# Altium PCB mdap2.PcbDoc
Units mil, origin at the board's own origin, x right, y up, seen from the top; angles counter-clockwise.
Board outline 6000 x 4000 mil, 3 copper layers (Top Layer, Mid-Layer 2, Bottom Layer); 94 components, 0 nets, 431 pads, 258 vias.
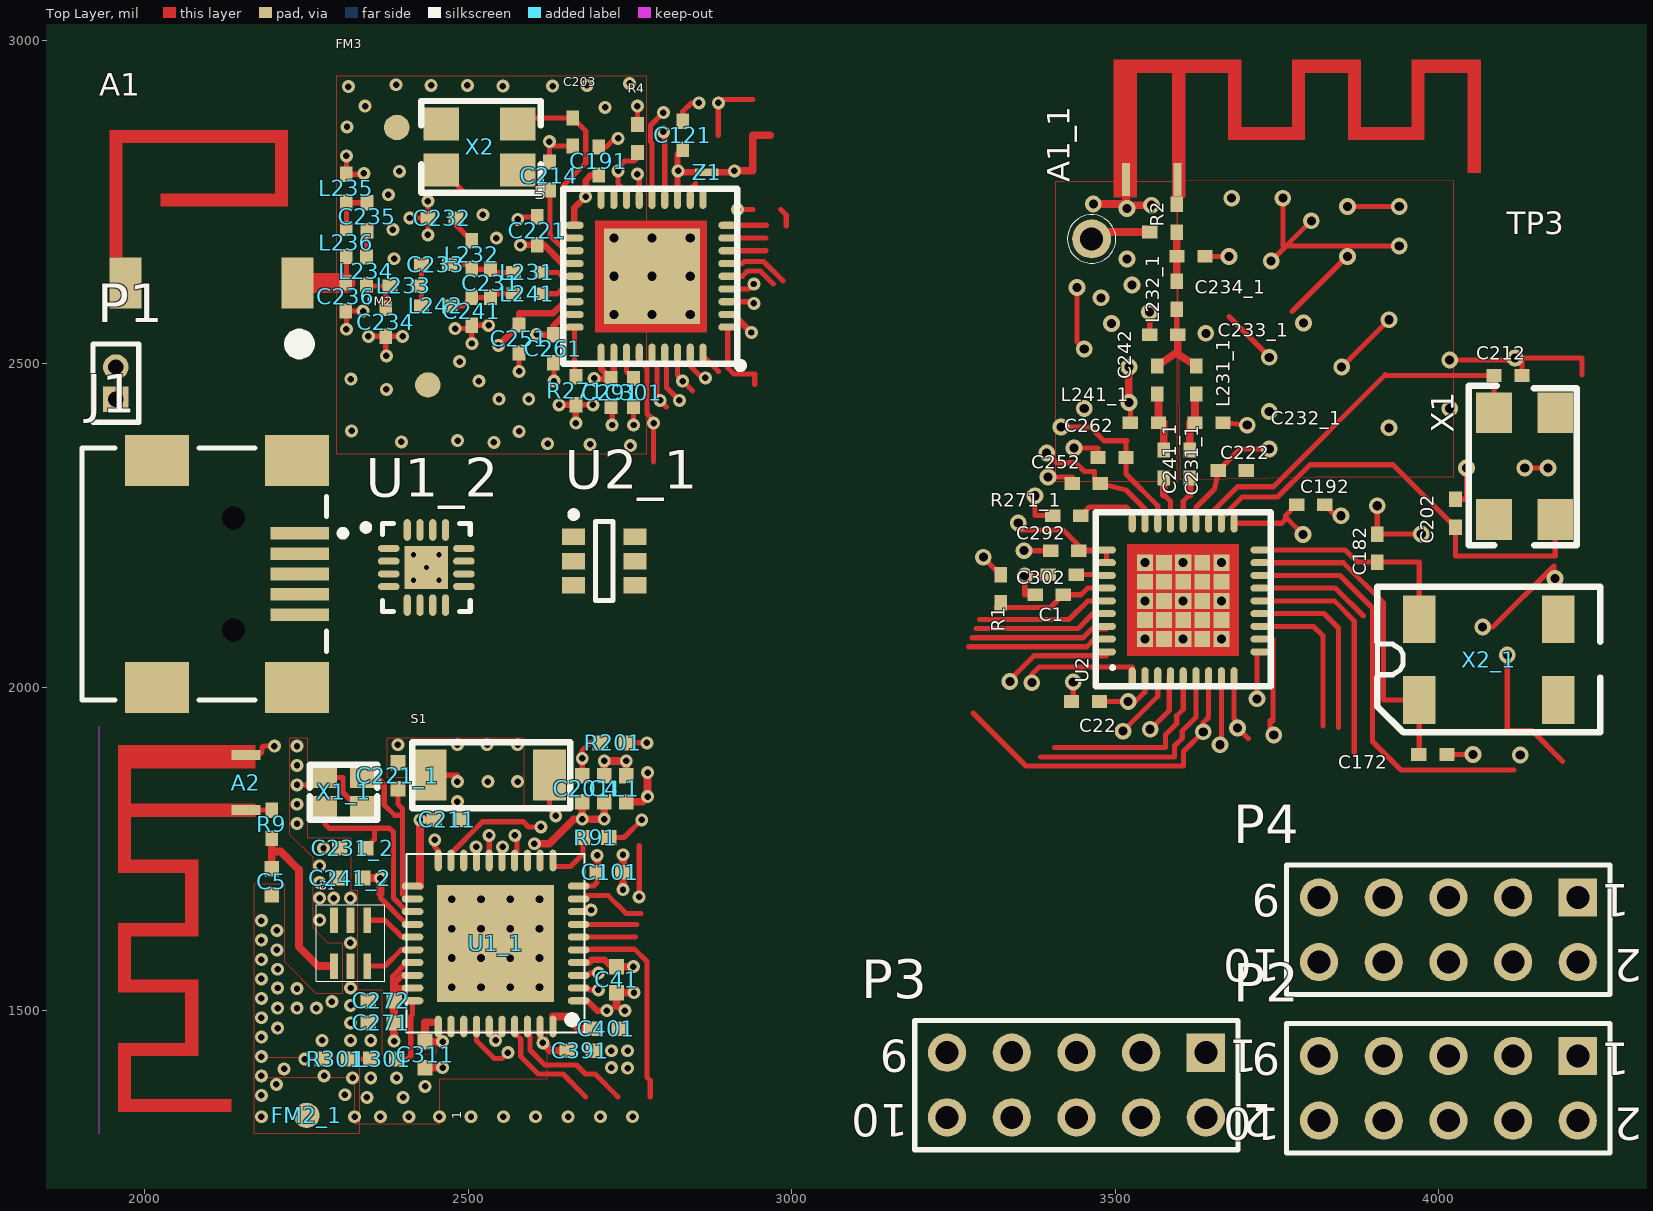
[diagram p0: Top Layer view]
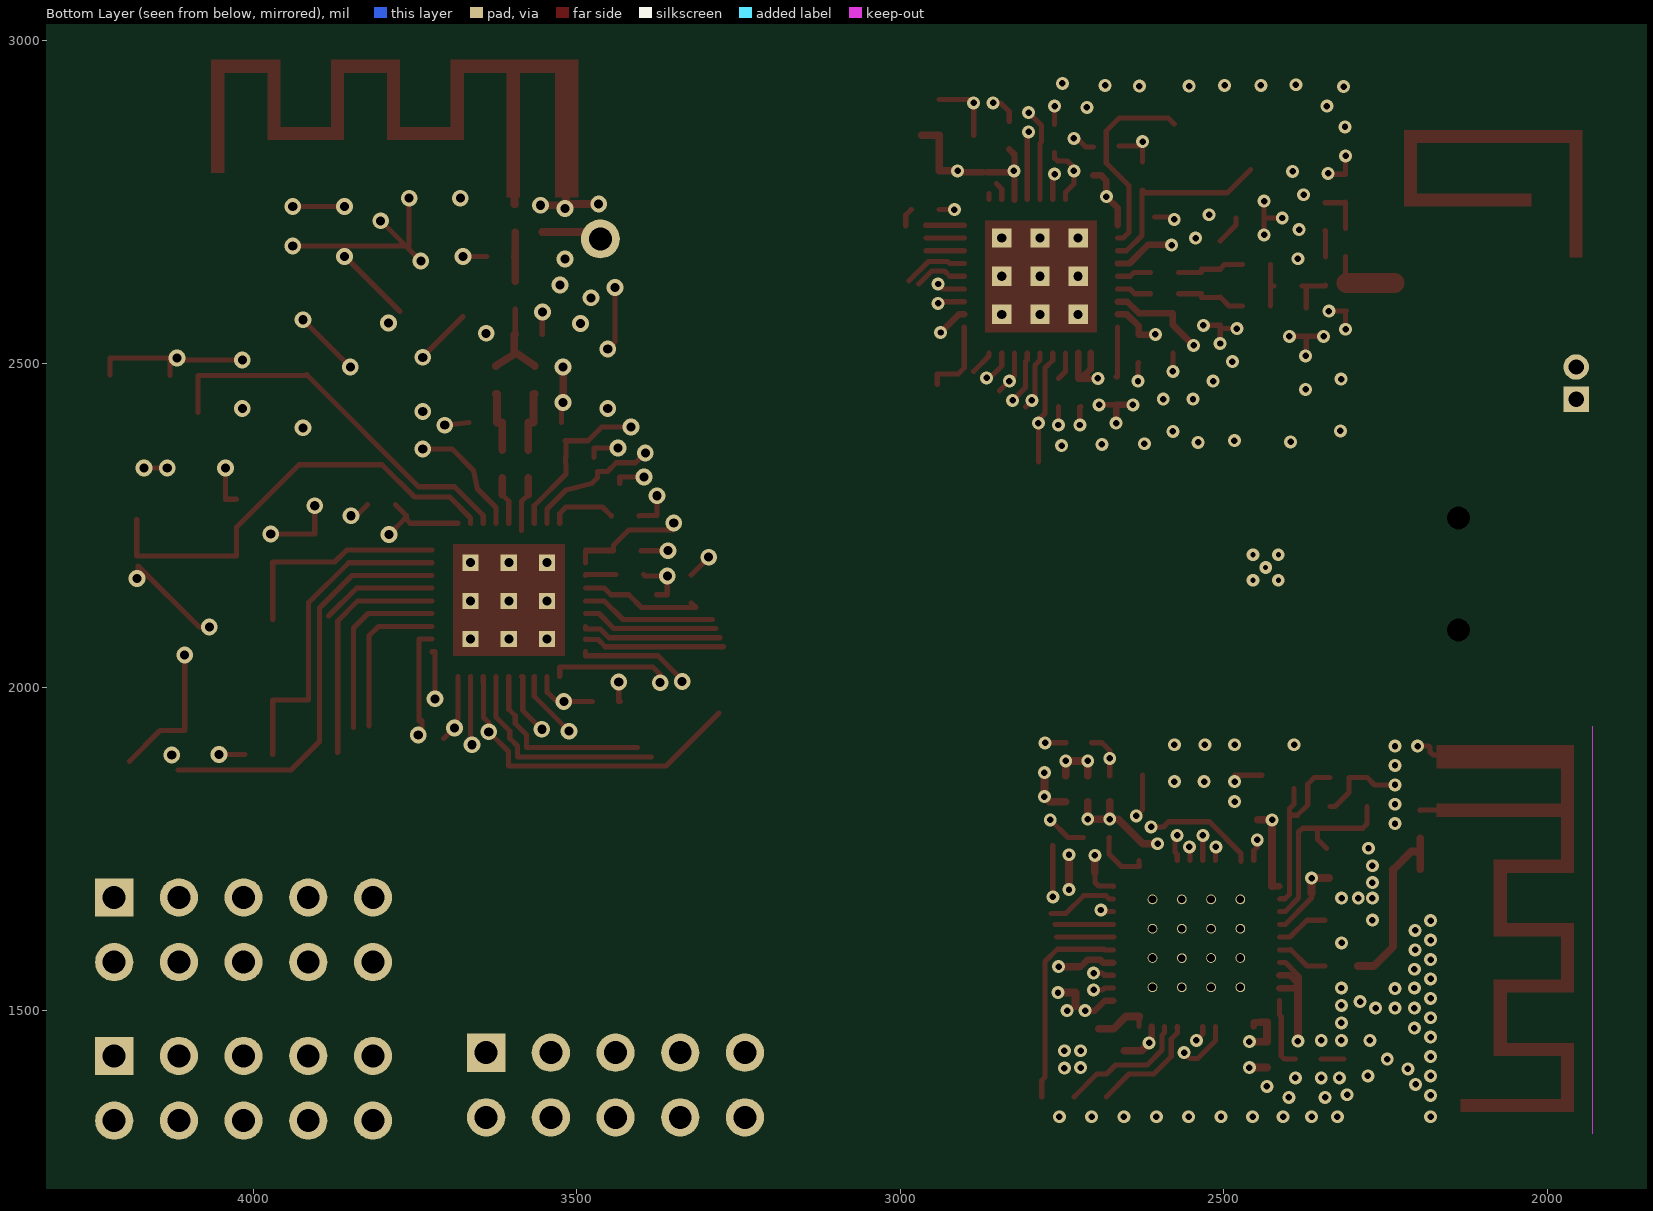
[diagram p1: Bottom Layer view, seen from below]
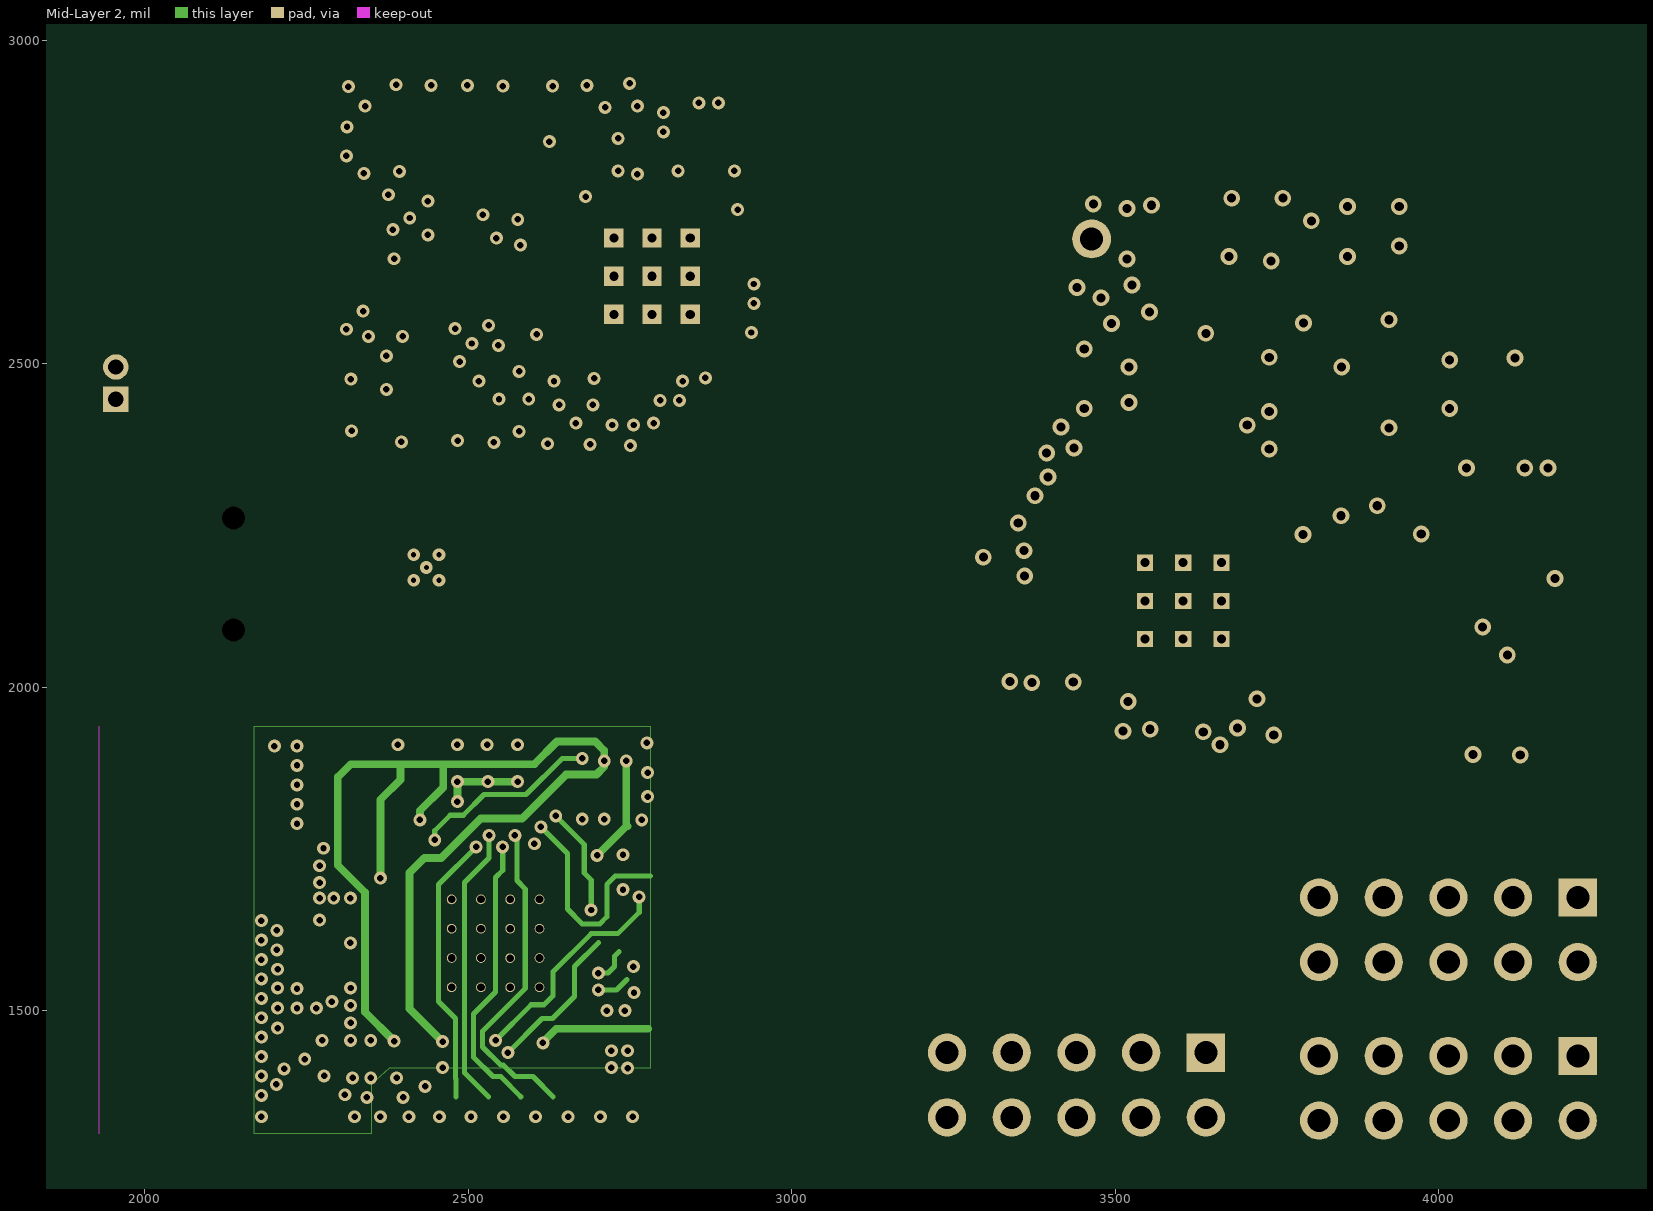
[diagram p2: Mid-Layer 2]

## Layer stack, top to bottom
Top Solder: solder mask 0.4, Solder Resist, Dk 3.5
Top Layer: signal copper 1.4
Dielectric 1: dielectric 12.6, FR-4, Dk 4.8
Mid-Layer 2: signal copper 1.4
Dielectric2: dielectric 12.6, FR-4, Dk 4.8
Bottom Layer: signal copper 1.4
Bottom Solder: solder mask 0.4, Solder Resist, Dk 3.5

## Board outline
1000,1000 7000,1000 7000,5000 1000,5000

## Design rules (kind name [scope] priority, off if disabled: settings)
Clearance [All] p1: gap=10
PolygonConnect [All] p1: connectstyle=Relief reliefconductorwidth=10 reliefentries=4 polygonreliefangle="90 Angle" airgapwidth=10
RoutingVias [All] p1: holewidth=28 width=50 viastyle="Through Hole" minholewidth=28 minwidth=50 maxholewidth=28 maxwidth=50
SolderMaskExpansion [All] p1: expansion=4
UnpouredPolygon [All] p1: allowunpoured=FALSE
Width [All] p1: maxlimit=10 minlimit=10 preferedwidth=10
29 further rules are at their usual default settings.

## Components (designator, comment, footprint, x,y, rotation, side; value= is the part's Value field where it differs from the comment)
A1 "Comment" Johanson_0868AT43A0020 2176.3,2555.32 r180 top
A1_1 "Comment" antenna_IIFA_1 3470,2671 r270 top
A2 "Comment" antenna_IIFA_1_left 1872,1938 r180 top
B1 "Comment" JTI_2450BM15A0002 2304,1687 r90 top
C1 "Comment" "0402 (REFLOW)" 3398,2143 r180 top
C4 "Comment" "0402 (REFLOW LF)" 2710,1843 r270 top
C5 "Comment" "0402 (REFLOW LF)" 2196,1699 r270 top
C22 "Comment" "0402 (REFLOW)" 3454,1978 r180 top
C41 "Comment" "0402 (REFLOW LF)" 2729,1548 r270 top
C101 "Comment" "0402 (REFLOW LF)" 2719,1714 r0 top
C121 "Comment" "0402 (REFLOW)" 2831.3,2853.32 r90 top
C172 "Comment" "0402 (REFLOW)" 3991,1896 r0 top
C182 "Comment" "0402 (REFLOW)" 3905,2215 r90 top
C191 "Comment" "0402 (REFLOW)" 2701.3,2813.32 r90 top
C192 "Comment" "0402 (REFLOW)" 3802,2282 r0 top
C201 "Comment" "0402 (REFLOW LF)" 2676,1843 r270 top
C202 "Comment" "0402 (REFLOW)" 4026,2269 r90 top
C203 "Comment" "0402 (REFLOW)" 2661.3,2858.32 r270 top
C211 "Comment" "0402 (REFLOW LF)" 2467,1795 r0 top
C212 "Comment" "0402 (REFLOW)" 4107,2482 r0 top
C214 "Comment" "0402 (REFLOW)" 2625.3,2790.32 r90 top
C221 "Comment" "0402 (REFLOW)" 2606.3,2705.41 r90 top
C221_1 "Comment" "0402 (REFLOW LF)" 2391,1863 r90 top
C222 "Comment" "0402 (REFLOW)" 3681,2335 r0 top
C231 "Comment" "0402 (REFLOW)" 2534.3,2624.32 r270 top
C231_1 "Comment" "0402 (REFLOW)" 3615,2345 r90 top
C231_2 "Comment" "0402 (REFLOW LF)" 2321,1751 r180 top
C232 "Comment" "0402 (REFLOW)" 2459.3,2725.32 r0 top
C232_1 "Comment" "0402 (REFLOW)" 3645,2409 r180 top
C233 "Comment" "0402 (REFLOW)" 2449.3,2653.32 r180 top
C233_1 "Comment" "0402 (REFLOW)" 3575,2545 r180 top
C234 "Comment" "0402 (REFLOW)" 2372.3,2564.32 r270 top
C234_1 "Comment" "0402 (REFLOW)" 3617,2666 r0 top
C235 "Comment" "0402 (REFLOW)" 2343.3,2727.32 r90 top
C236 "Comment" "0402 (REFLOW)" 2310.3,2603.32 r270 top
C241 "Comment" "0402 (REFLOW)" 2505.3,2581.32 r270 top
C241_1 "Comment" "0402 (REFLOW)" 3575,2345 r90 top
C241_2 "Comment" "0402 (REFLOW LF)" 2317,1705 r180 top
C242 "Comment" "0402 (REFLOW)" 3565,2475 r270 top
C251 "Comment" "0402 (REFLOW)" 2578.3,2538.32 r270 top
C252 "Comment" "0402 (REFLOW)" 3455,2315 r180 top
C261 "Comment" "0402 (REFLOW)" 2631.3,2523.32 r270 top
C262 "Comment" "0402 (REFLOW)" 3495,2355 r180 top
C271 "Comment" "0402 (REFLOW LF)" 2365,1481 r180 top
C272 "Comment" "0402 (REFLOW LF)" 2365,1515 r180 top
C291 "Comment" "0402 (REFLOW)" 2720.3,2455.41 r270 top
C292 "Comment" "0402 (REFLOW)" 3422,2211 r180 top
C301 "Comment" "0402 (REFLOW)" 2755.3,2455.41 r90 top
C302 "Comment" "0402 (REFLOW)" 3418,2174 r0 top
C311 "Comment" "0402 (REFLOW LF)" 2433,1432 r270 top
C391 "Comment" "0402 (REFLOW LF)" 2673,1438 r0 top
C401 "Comment" "0402 (REFLOW LF)" 2713,1472 r0 top
FM2 "Comment" FIDUCAL_MARK 2437.3,2467.32 r90 top
FM2_1 "Comment" FIDUCAL_MARK_1mm 2250,1338 r90 top
FM3 "Comment" FIDUCAL_MARK 2389.3,2865.32 r90 top
J1 "440247-1" 440247 1930,2175 r180 top
L1 "Comment" "0402 (REFLOW LF)" 2744,1843 r270 top
L231 "Comment" "0402 (REFLOW)" 2591.3,2641.32 r0 top
L231_1 "Comment" "0402 (REFLOW)" 3625,2475 r90 top
L232 "Comment" "0402 (REFLOW)" 2505.3,2668.32 r270 top
L232_1 "Comment" "0402 (REFLOW)" 3595,2606 r90 top
L233 "Comment" "0402 (REFLOW)" 2400.3,2620.32 r0 top
L234 "Comment" "0402 (REFLOW)" 2342.3,2643.32 r270 top
L235 "Comment" "0402 (REFLOW)" 2311.3,2771.32 r90 top
L236 "Comment" "0402 (REFLOW)" 2311.3,2687.32 r90 top
L241 "Comment" "0402 (REFLOW)" 2591.3,2608.32 r0 top
L241_1 "Comment" "0402 (REFLOW)" 3545,2409 r180 top
L242 "Comment" "0402 (REFLOW)" 2449.3,2589.32 r0 top
L301 "Comment" "0402 (REFLOW LF)" 2369,1425 r180 top
P1 "Header 2" MHDR1X2 1955,2445 r90 top
P2 "Header 5X2" HDR2X5 4215,1430 r180 top
P3 "Header 5X2" HDR2X5 3640,1435 r180 top
P4 "Header 5X2" HDR2X5 4215,1675 r180 top
R1 "Comment" "0402 (REFLOW)" 3323,2152 r270 top
R2 "Comment" "0402_3port (REFLOW)" 3595,2725 r270 top
R4 "Comment" "0402 (REFLOW)" 2761.3,2848.32 r90 top
R9 "Comment" "0402 (REFLOW)" 2196,1788 r90 top
R91 "Comment" "0402 (REFLOW LF)" 2696.83,1767.57 r180 top
R201 "Comment" "0402 (REFLOW LF)" 2724,1914 r180 top
R271 "Comment" "0402 (REFLOW)" 2666.3,2458.32 r270 top
R271_1 "Comment" "0402 (REFLOW)" 3425,2265 r0 top
R301 "Comment" "0402 (REFLOW LF)" 2294,1425 r0 top
S1 "Comment" "PUSH_BUTTON_SKRK (Alps new pad size)" 2533,1864 r0 top
TP3 "Comment" "TESTPOINT (small)" 3463.4,2692.9 r0 top
U1 "Comment" "QLP36_4_4 (Reflow)" 2782.3,2635.32 r180 top
U1_1 "Comment" "QFN40_RHA (DATASHEET)" 2542,1604 r180 top
U1_2 "BQ24232RGTR" RGT16-1700X1700TP 2435,2185 r0 top (schematic designator U1)
U2 "Comment" "QLP36_4_4 norteam silk (Reflow)" 3605,2135 r90 top
U2_1 "TPS62730_DRY_6" SOT23-6_L 2710,2195 r0 top (schematic designator U2)
X1 "Comment" "XTAL_SMD_5.2x3.4mm (5.2 x 3.4 mm)" 4133,2339 r90 top
X1_1 "Comment" "XTAL_SMD_2x1_6 (2.0x1.6mm no paste reduction)" 2307,1838 r0 top
X2 "Comment" "XTAL_SMD_4x2_5 (4.0 x 2.5 mm)" 2517.3,2835.32 r0 top
X2_1 "Comment" "XTAL_SMD_85SMX (8.7x3.8mm)" 4075,2045 r0 top
Z1 "Comment" "SHORT_small2 (small2)" 2801.3,2787.32 r0 top

## Footprints (in the part's own frame and the unit in brackets; to place one, negate y for a bottom-side part, rotate by r counter-clockwise, add the part's x,y. Pads: shape width x height; smd on the part's side, far side on the other; paste and mask are expansions set on the pad)
"0402 (REFLOW LF)" [mil]
  rect 24x23 smd paste+0 mask+6: 1(-20,0) 2(20,0)
"0402 (REFLOW)" [mm]
  rect 0.6x0.5 smd paste+0 mask+0.1: 1(-0.55,0) 2(0.55,0)
"0402_3port (REFLOW)" [mm]
  rect 0.6x0.5 smd paste+0 mask+0.1: 1(-0.55,0) 2(0.55,0)
  rect 0.5x0.6 smd paste+0 mask+0.1: 3(0.537,-1.057)
440247 [mm] "Connector; USB2.0, Type B, SM; 5 Position; Right Angle"
  rect 2.3x0.5 smd: 1(-7.85,-1.6) 2(-7.85,-0.8) 3(-7.85,0) 4(-7.85,0.8) 5(-7.85,1.6)
  rect 2.5x2 smd: 6(-7.75,4.45) 7(-2.25,4.45) 8(-7.75,-4.45) 9(-2.25,-4.45)
  round 0.6 hole 0.9 unplated: MH1(-5.25,2.2) MH2(-5.25,-2.2)
  silkscreen extent -9.68,-4.95 0.7,4.95
antenna_IIFA_1 [mm]
  rect 1.3x0.3 smd paste-0.3 mask-0.3: 1(-2.899,3.203) 2(-2.899,1.183)
  Top Layer region: -7.589,10.403 -4.449,10.403 -4.449,9.903 -7.589,9.903
  Top Layer region: -7.589,7.703 -7.089,7.703 -7.089,10.403 -7.589,10.403
  Top Layer region: -4.949,5.203 -4.449,5.203 -4.449,8.203 -4.949,8.203
  Top Layer region: -4.449,5.203 -7.589,5.203 -7.589,5.703 -4.449,5.703
  Top Layer region: -4.949,9.903 -4.449,9.903 -4.449,12.903 -4.949,12.903
  Top Layer region: -4.449,12.903 -7.589,12.903 -7.589,12.403 -4.449,12.403
  Top Layer region: -7.589,12.403 -7.089,12.403 -7.089,15.103 -7.589,15.103
  Top Layer region: -4.449,8.203 -7.589,8.203 -7.589,7.703 -4.449,7.703
  Top Layer region: -7.589,0.703 -2.199,0.703 -2.199,1.603 -7.589,1.603
  Top Layer region: -7.589,15.103 -3.149,15.103 -3.149,14.603 -7.589,14.603
  Top Layer region: -7.589,3.003 -2.199,3.003 -2.199,3.503 -7.589,3.503
  Top Layer region: -7.589,0.703 -7.089,0.703 -7.089,5.703 -7.589,5.703
antenna_IIFA_1_left [mil]
  rect 45x15 smd paste+0 mask+4: 1(-284.03,127.96) 2(-284.03,42.96)
  Top Layer region: -106.28,27.68 -86.59,27.68 -86.59,224.54 -106.28,224.54
  Top Layer region: -298.8,118.24 -86.59,118.24 -86.59,137.92 -298.8,137.92
  Top Layer region: -261.39,594.61 -86.59,594.61 -86.59,574.93 -261.39,574.93
  Top Layer region: -298.8,27.68 -86.59,27.68 -86.59,63.12 -298.8,63.12
  Top Layer region: -86.59,322.96 -210.21,322.96 -210.21,303.28 -86.59,303.28
  Top Layer region: -106.28,488.31 -86.59,488.31 -86.59,594.61 -106.28,594.61
  Top Layer region: -86.59,508 -210.21,508 -210.21,488.31 -86.59,488.31
  Top Layer region: -210.21,389.89 -190.53,389.89 -190.53,508 -210.21,508
  Top Layer region: -86.59,204.85 -210.21,204.85 -210.21,224.54 -86.59,224.54
  Top Layer region: -210.21,204.85 -190.53,204.85 -190.53,322.96 -210.21,322.96
  Top Layer region: -106.28,303.28 -86.59,303.28 -86.59,409.57 -106.28,409.57
  Top Layer region: -210.21,409.57 -86.59,409.57 -86.59,389.89 -210.21,389.89
FIDUCAL_MARK [mm]
  round 1 smd paste+0 mask+2: 1(0,0)
FIDUCAL_MARK_1mm [mil]
  round 39.4 smd paste-39.4 mask+39.4: 1(0,0)
HDR2X5 [mm] "Connector; Header; 5x2 Position"
  rect 1.5x1.5 hole 0.9: 1(0,0)
  round 1.5 hole 0.9: 2(0,2.54) 3(2.54,0) 4(2.54,2.54) 5(5.08,0) 6(5.08,2.54) 7(7.62,0) 8(7.62,2.54) 9(10.16,0) 10(10.16,2.54)
  silkscreen extent -1.27,-1.27 11.43,3.81
Johanson_0868AT43A0020 [mm]
  rect 1.25x2 smd paste+0 mask+0.1: 1(-1.51,-1.77) 2(5.24,-1.77)
  Top Layer region: -0.635,-7.27 5.365,-7.27 5.365,-7.77 -0.635,-7.77
  Top Layer region: 5.365,-2.77 5.865,-2.77 5.865,-7.77 5.365,-7.77
  Top Layer region: -1.135,-4.77 -0.635,-4.77 -0.635,-7.77 -1.135,-7.77
  Top Layer region: -0.635,-4.77 3.865,-4.77 3.865,-5.27 -0.635,-5.27
  silkscreen extent -2.18,0.03 -0.99,1.23
JTI_2450BM15A0002 [mm]
  rect 1x0.3 smd paste+0 mask+0.02: 1(-3,0.3) 2(-3,-0.35) 3(-3,-1) 4(-1.2,-1) 5(-1.2,-0.35) 6(-1.2,0.3)
  silkscreen extent -3.6,-1.7 -0.6,1
MHDR1X2 [mm] "Connector; Header; 2 Position"
  rect 1x1 hole 0.6: 1(0,0)
  round 1 hole 0.6: 2(1.27,0)
  silkscreen extent -0.9,-0.9 2.17,0.9
"PUSH_BUTTON_SKRK (Alps new pad size)" [mm]
  rect 1.3x2 smd paste+0 mask+0.2: 1(-2.35,0) 2(2.35,0)
  silkscreen extent -3.05,-1.3 3.16,1.3
"QFN40_RHA (DATASHEET)" [mm]
  oval 0.85x0.28 smd paste+0 mask+0.14: 1(-3.26,2.255) 2(-3.26,1.755) 3(-3.26,1.255) 4(-3.26,0.755) 5(-3.26,0.255) 6(-3.26,-0.245) 7(-3.26,-0.745) 8(-3.26,-1.245) 9(-3.26,-1.745) 10(-3.26,-2.245) 21(3.26,-2.245) 22(3.26,-1.745) 23(3.26,-1.245) 24(3.26,-0.745) 25(3.26,-0.245) 26(3.26,0.255) 27(3.26,0.755) 28(3.26,1.255) 29(3.26,1.755) 30(3.26,2.255)
  oval 0.28x0.85 smd paste+0 mask+0.14: 11(-2.25,-3.255) 12(-1.75,-3.255) 13(-1.25,-3.255) 14(-0.75,-3.255) 15(-0.25,-3.255) 16(0.25,-3.255) 17(0.75,-3.255) 18(1.25,-3.255) 19(1.75,-3.255) 20(2.25,-3.255) 31(2.25,3.265) 32(1.75,3.265) 33(1.25,3.265) 34(0.75,3.265) 35(0.25,3.265) 36(-0.25,3.265) 37(-0.75,3.265) 38(-1.25,3.265) 39(-1.75,3.265) 40(-2.25,3.265)
  rect 4.6x4.6 smd paste-4.6 mask+0: 41(0,0)
  round 0.381 hole 0.3 paste+0 mask+0: 42(-1.725,-1.725) 43(-1.725,-0.575) 44(-1.725,0.575) 45(-1.725,1.725) 46(-0.575,1.725) 47(-0.57,0.58) 48(-0.575,-0.575) 49(-0.575,-1.725) 50(0.575,-1.725) 51(0.575,-0.575) 52(0.575,0.575) 53(0.575,1.725) 54(1.725,1.725) 55(1.725,0.575) 56(1.725,-0.575) 57(1.725,-1.725)
  rect 1.1x1.1 smd paste+0 mask+0: 58(-1.55,-1.55) 59(-1.55,0) 60(-1.55,1.55) 61(0,1.55) 62(0,0) 63(0,-1.55) 64(1.55,-1.55) 65(1.55,0) 66(1.55,1.55)
  silkscreen extent -3.5,-3.5 3.5,3.5
"QLP36_4_4 (Reflow)" [mil]
  oval 29x11 smd paste+0 mask+4: 1(-118.5,78.74) 2(-118.5,59.06) 3(-118.5,39.37) 4(-118.5,19.68) 5(-118.5,0) 6(-118.5,-19.68) 7(-118.5,-39.37) 8(-118.5,-59.06) 9(-118.5,-78.74) 19(118.5,-78.74) 20(118.5,-59.06) 21(118.5,-39.37) 22(118.5,-19.68) 23(118.5,0) 24(118.5,19.68) 25(118.5,39.37) 26(118.5,59.06) 27(118.5,78.74)
  oval 11x29 smd paste+0 mask+4: 10(-80.32,-118.5) 11(-60.63,-118.5) 12(-40.94,-118.5) 13(-21.26,-118.5) 14(-1.57,-118.5) 15(18.11,-118.5) 16(37.8,-118.5) 17(57.48,-118.5) 18(77.17,-118.5) 28(77.17,118.5) 29(57.48,118.5) 30(37.8,118.5) 31(18.11,118.5) 32(-1.57,118.5) 33(-21.26,118.5) 34(-40.94,118.5) 35(-60.63,118.5) 36(-80.32,118.5)
  rect 30x30 hole 14 paste+0 mask+0: 37(-60.63,59.06) 39(-1.57,59.06) 41(57.48,59.06) 47(-60.63,0) 49(-1.57,0) 51(57.48,0) 57(-60.63,-59.06) 59(-1.57,-59.06) 61(57.48,-59.06)
  rect 30x30 smd paste+0 mask+0: 38(-31.1,59.06) 40(27.95,59.06) 42(-60.63,29.53) 43(-31.1,29.53) 44(-1.57,29.53) 45(27.95,29.53) 46(57.48,29.53) 48(-31.1,0) 50(27.95,0) 52(-60.63,-29.53) 53(-31.1,-29.53) 54(-1.57,-29.53) 55(27.95,-29.53) 56(57.48,-29.53) 58(-31.1,-59.06) 60(27.95,-59.06)
  Top Layer region: -81.89,81.89 79.53,81.89 79.53,-79.53 -81.89,-79.53
  Top Layer region: -81.5,80.71 79.92,80.71 79.92,-80.71 -81.5,-80.71
  Top Layer region: -81.5,81.1 79.92,81.1 79.92,-80.32 -81.5,-80.32
  Top Layer region: -80.32,79.53 78.74,79.53 78.74,-79.53 -80.32,-79.53
  Top Layer region: -81.89,79.92 79.53,79.92 79.53,-81.5 -81.89,-81.5
  Top Layer region: -81.89,80.71 79.53,80.71 79.53,-80.71 -81.89,-80.71
  Top Layer region: -81.5,81.89 79.92,81.89 79.92,-79.53 -81.5,-79.53
  Top Layer region: -81.89,80.71 79.53,80.71 79.53,-80.71 -81.89,-80.71
  Top Layer region: -82.28,81.5 79.13,81.5 79.13,-79.92 -82.28,-79.92
  Top Layer region: -81.89,80.71 79.53,80.71 79.53,-80.71 -81.89,-80.71
  Top Layer region: -82.28,81.5 79.13,81.5 79.13,-79.92 -82.28,-79.92
  Top Layer region: -81.5,80.32 79.92,80.32 79.92,-81.1 -81.5,-81.1
  Top Layer region: -81.1,81.89 80.31,81.89 80.31,-79.53 -81.1,-79.53
  Top Layer region: -81.1,80.71 80.31,80.71 80.31,-80.71 -81.1,-80.71
  Top Layer region: -81.1,80.71 80.31,80.71 80.31,-80.71 -81.1,-80.71
  Top Layer region: -80.71,80.71 80.71,80.71 80.71,-80.71 -80.71,-80.71
  Top Layer region: -81.1,80.71 80.31,80.71 80.31,-80.71 -81.1,-80.71
  Top Layer region: -82.28,80.32 79.13,80.32 79.13,-81.1 -82.28,-81.1
  Top Layer region: -80.71,80.71 80.71,80.71 80.71,-80.71 -80.71,-80.71
  Top Layer region: -80.71,80.71 80.71,80.71 80.71,-80.71 -80.71,-80.71
  Top Layer region: -81.1,80.71 80.31,80.71 80.31,-80.71 -81.1,-80.71
  Top Layer region: -79.53,80.71 79.53,80.71 79.53,-80.71 -79.53,-80.71
  Top Layer region: -82.68,82.28 82.28,82.28 82.28,-82.68 -82.68,-82.68
  Top Layer region: -86.34,86.34 86.26,86.34 86.26,-85.94 -86.34,-85.94
  silkscreen extent -148,-135 135,148
"QLP36_4_4 norteam silk (Reflow)" [mm]
  oval 0.737x0.279 smd paste+0.003 mask+0.102: 1(-3.01,2) 2(-3.01,1.5) 3(-3.01,1) 4(-3.01,0.5) 5(-3.01,0) 6(-3.01,-0.5) 7(-3.01,-1) 8(-3.01,-1.5) 9(-3.01,-2) 19(3.01,-2) 20(3.01,-1.5) 21(3.01,-1) 22(3.01,-0.5) 23(3.01,0) 24(3.01,0.5) 25(3.01,1) 26(3.01,1.5) 27(3.01,2)
  oval 0.279x0.737 smd paste+0.003 mask+0.102: 10(-2.04,-3.01) 11(-1.54,-3.01) 12(-1.04,-3.01) 13(-0.54,-3.01) 14(-0.04,-3.01) 15(0.46,-3.01) 16(0.96,-3.01) 17(1.46,-3.01) 18(1.96,-3.01) 28(1.96,3.01) 29(1.46,3.01) 30(0.96,3.01) 31(0.46,3.01) 32(-0.04,3.01) 33(-0.54,3.01) 34(-1.04,3.01) 35(-1.54,3.01) 36(-2.04,3.01)
  rect 0.635x0.635 hole 0.356 paste+0 mask+0: 37(-1.54,1.5) 39(-0.04,1.5) 41(1.46,1.5) 47(-1.54,0) 49(-0.04,0) 51(1.46,0) 57(-1.54,-1.5) 59(-0.04,-1.5) 61(1.46,-1.5)
  rect 0.62x0.62 smd mask+0: 38(-0.79,1.5) 40(0.71,1.5) 42(-1.54,0.75) 43(-0.79,0.75) 44(-0.04,0.75) 45(0.71,0.75) 46(1.46,0.75) 48(-0.79,0) 50(0.71,0) 52(-1.54,-0.75) 53(-0.79,-0.75) 54(-0.04,-0.75) 55(0.71,-0.75) 56(1.46,-0.75) 58(-0.79,-1.5) 60(0.71,-1.5)
  Top Layer region: -2.08,2.08 2.02,2.08 2.02,-2.02 -2.08,-2.02
  Top Layer region: -2.07,2.05 2.03,2.05 2.03,-2.05 -2.07,-2.05
  Top Layer region: -2.07,2.06 2.03,2.06 2.03,-2.04 -2.07,-2.04
  Top Layer region: -2.04,2.02 2,2.02 2,-2.02 -2.04,-2.02
  Top Layer region: -2.08,2.03 2.02,2.03 2.02,-2.07 -2.08,-2.07
  Top Layer region: -2.08,2.05 2.02,2.05 2.02,-2.05 -2.08,-2.05
  Top Layer region: -2.07,2.08 2.03,2.08 2.03,-2.02 -2.07,-2.02
  Top Layer region: -2.08,2.05 2.02,2.05 2.02,-2.05 -2.08,-2.05
  Top Layer region: -2.09,2.07 2.01,2.07 2.01,-2.03 -2.09,-2.03
  Top Layer region: -2.08,2.05 2.02,2.05 2.02,-2.05 -2.08,-2.05
  Top Layer region: -2.09,2.07 2.01,2.07 2.01,-2.03 -2.09,-2.03
  Top Layer region: -2.07,2.04 2.03,2.04 2.03,-2.06 -2.07,-2.06
  Top Layer region: -2.06,2.08 2.04,2.08 2.04,-2.02 -2.06,-2.02
  Top Layer region: -2.06,2.05 2.04,2.05 2.04,-2.05 -2.06,-2.05
  Top Layer region: -2.06,2.05 2.04,2.05 2.04,-2.05 -2.06,-2.05
  Top Layer region: -2.05,2.05 2.05,2.05 2.05,-2.05 -2.05,-2.05
  Top Layer region: -2.06,2.05 2.04,2.05 2.04,-2.05 -2.06,-2.05
  Top Layer region: -2.09,2.04 2.01,2.04 2.01,-2.06 -2.09,-2.06
  Top Layer region: -2.05,2.05 2.05,2.05 2.05,-2.05 -2.05,-2.05
  Top Layer region: -2.05,2.05 2.05,2.05 2.05,-2.05 -2.05,-2.05
  Top Layer region: -2.06,2.05 2.04,2.05 2.04,-2.05 -2.06,-2.05
  Top Layer region: -2.02,2.05 2.02,2.05 2.02,-2.05 -2.02,-2.05
  Top Layer region: -2.1,2.09 2.09,2.09 2.09,-2.1 -2.1,-2.1
  Top Layer region: -2.193,2.193 2.191,2.193 2.191,-2.183 -2.193,-2.183
  silkscreen extent -3.39,-3.43 3.44,3.43
RGT16-1700X1700TP [mm] "QFN, 16-Leads, Body 3x3mm, Pitch 0.5mm, Thermal Pad 1.7x1.7mm, TI Recommended"
  oval 0.85x0.28 smd paste-0.025 mask+0.07: 1(-1.475,0.75) 2(-1.475,0.25) 3(-1.475,-0.25) 4(-1.475,-0.75) 9(1.475,-0.75) 10(1.475,-0.25) 11(1.475,0.25) 12(1.475,0.75)
  oval 0.28x0.85 smd paste-0.025 mask+0.07: 5(-0.75,-1.475) 6(-0.25,-1.475) 7(0.25,-1.475) 8(0.75,-1.475) 13(0.75,1.475) 14(0.25,1.475) 15(-0.25,1.475) 16(-0.75,1.475)
  rect 1.7x1.7 smd paste-0.85 mask+0.07: 17(0,0)
  silkscreen extent -2.5,-1.73 1.73,1.73, body extent -1.57,-1.57 1.58,1.58, height 1
"SHORT_small2 (small2)" [mil]
  rect 30x12 smd paste+0 mask-12: 1(63.98,8.8) 2(70.28,8.8)
SOT23-6_L [mm] "SOT23, 6-Leads, Body 2.9x1.6mm, Pitch 0.95mm, Lead Span 2.7mm, IPC High Density"
  rect 0.9x0.65 smd: 1(-1.2,0.95) 2(-1.2,0) 3(-1.2,-0.95) 4(1.2,-0.95) 5(1.2,0) 6(1.2,0.95)
  silkscreen extent -1.32,-1.55 0.35,1.95, body extent -0.9,-1.55 0.9,1.55, height 1.45
"TESTPOINT (small)" [mil]
  round 60 hole 36 paste+0 mask+4: 1(0,0)
  silkscreen extent -38,-37 38,37
"XTAL_SMD_2x1_6 (2.0x1.6mm no paste reduction)" [mil]
  rect 37.5x33.5 smd paste+0 mask+3.9: 1(-28.54,-22.64) 2(28.54,-22.64) 3(28.54,22.64) 4(-28.54,22.64)
  silkscreen extent -52,-43 52,42
"XTAL_SMD_4x2_5 (4.0 x 2.5 mm)" [mil]
  rect 55x51 smd paste+0 mask+2: 1(-59.06,-35.43) 2(59.06,-35.43) 3(59.06,35.43) 4(-59.06,35.43)
  silkscreen extent -91,-71 94,71
"XTAL_SMD_5.2x3.4mm (5.2 x 3.4 mm)" [mm]
  rect 1.6x1.4 smd paste-0.05 mask+0.05: 1(-2.03,-1.195) 2(-2.03,1.205) 3(2.17,1.205) 4(2.17,-1.195)
  silkscreen extent -3.03,-2.04 3.22,2.2
"XTAL_SMD_85SMX (8.7x3.8mm)" [mil]
  rect 50x74 smd paste+0 mask+4: 1(-105,-65) 2(110,-65) 3(110,60) 4(-105,60)
  silkscreen extent -170,-115 175,110

## Part data
A1: library part Johanson_868_MHz_Chip_Antenna
A1_1: library part Antenna_IIFA_1, "Antenna single ended IIFA, 2450 MHz"
A2: library part ANTENNA_IIFA_1_LEFT
B1: library part JTI_2450BM15A0002, "Johanson Technology balun especially designed for operation with CC2530, CC2531, CC2505 and CC2540"
C1 C201: library part C_1N_0402_NP0_J_50, "Capacitor 0402"
C4: library part C_2U2_0402_X5R_M_4VDC, "Capasitor 0402, GRM155R60G225ME15J"
C5: library part C_0P5_0402_NP0_B_50, "Capacitor, 0.5p, 0402, NP0, +/-0.1pF 50V"
C22 C101 C211 C222 C241_2 C252 C271 C292 C311: library part C_100N_0402_X5R_K_10, "Capacitor 0402"
C41: library part C_10P_0402_NP0_J_50, "Capacitor 0402"
C121 C291 C301: library part C_100N_0402_X5R_K_10
C172 C182: library part C_15P_0402_NP0_J_50, "Capacitor, 0402"
C191 C251: library part C_10N_0402_X7R_K_25
C192 C262 C272: library part C_220P_0402_NP0_J_50, "Capacitor 0402"
C202 C212: library part C_27P_0402_NP0_J_50, "Capacitor 0402"
C203 C214: library part C_33P_0402_NP0_J_50
C221: library part C_2P2_0402_NP0_C_50
C221_1 C231_2: library part C_12P_0402_NP0_J_50, "Capacitor 0402"
C231: library part C_1P0_0402_NP0_C_50
C231_1 C241_1: library part C_100P_0402_NP0_J_50, "Capacitor 0402"
C232 C235: library part C_100P_0402_NP0_J_50
C232_1 C242: library part C_1P0_0402_NP0_C_50, "Capacitor 0402"
C233 C241: library part C_1P5_0402_NP0_C_50
C233_1: library part C_1P8_0402_NP0_C_50, "Capacitor 0402"
C234: library part C_3P3_0402_NP0_C_50
C234_1: library part C_1P5_0402_NP0_C_50, "Capacitor 0402"
C236: library part C_0402
C261: library part C_220P_0402_NP0_J_50
C302 C391 C401: library part C_1U_0402_X5R_K_6P3, "Capacitor 0402"
FM2 FM3: library part FIDUCIAL_MARK
FM2_1: library part FIDUCIAL_MARK_1MM, "Fiducial mark, 1mm metal diameter"
J1: "USB 2.0, Right Angle, SMT, B Type, Receptacle, 5 Position, Black"
L1: library part L_BEAD_102_0402, "EMI filter bead"
L231 L233 L234 L235 L241: library part L_12N_0402_J
L231_1 L232_1 L241_1: library part L_1N2_0402_S, "Inductor 0402"
L232 L242: library part L_18N_0402_J
L236: library part L_1N8_0402_S
L301: library part L_6N8_0402_J, "Inductor 0402"
P1: "Header, 2-Pin"
P2 P3 P4: "Header, 5-Pin, Dual row"
R1: library part R_2K7_0402_F, "Resistor 0402"
R2: library part R_0_0402_3PORT, "Resistor 0402, with extra pad"
R4: library part R_4K7_0402_G
R9 R91: library part R_0_0402, "Resistor, 0402"
R201: library part R_2K2_0402_G, "Resistor 0402"
R271: library part R_56K_0402_F
R271_1 R301: library part R_56K_0402_F, "Resistor 0402"
S1: library part PUSH_BUTTON_SKRK, "Push button, SMD 3.9*2.9*2.0 mm"
TP3: library part TESTPIN_SMALL, "Drilled plated trough-hole testpoint with no pin inserted. Suitable for soldering wire to."
U1: library part CC1111
U1_1: library part CC2540, "Single chip BLE"
U1_2: "USB Friendly 0.5 A Li+ Charger with Dynamic Power Management, 10.5 V OVP, 4.3 V, -40 to 85 degC, 16-pin QFN (RGT), Green (RoHS & no Sb/Br)"
U2: library part CC2510, "Single chip transceiver"
U2_1: "Imported"
X1: library part X_26.000/10/10/10/16/A, "26 MHz SMD Crystal (AKER Electronics)"
X1_1: library part X_32.000/10/20/60/10, "Epson Toyocom FA128 32 MHz 2x1.6mm 10 pF, -40/85C, Q22FA1280009200"
X2: library part X_48.000/20/35/20/18
X2_1: library part X_32.768/20/50/40/12, "Crystal, MC-306 SMD"
Z1: library part SHORT_SMALL

## Via types
v1: diameter 20, hole 10, Top Layer to Bottom Layer, 187 vias
v2: diameter 26, hole 14, Top Layer to Bottom Layer, 66 vias
v3: diameter 19.68, hole 7.87, Top Layer to Bottom Layer, tented top, 5 vias

## Nets (pads, with @x,y where several pads share a name; then routed paths per layer and width w, separated by ;. In a path a pad name is that pad's centre, name@x,y a point inside that pad or via, vN(x,y) a via of type N, cw(c..) or ccw(c..) an arc to the next point about the centre after c; other vN are vias at no path point)
pads on no net: A1.1 A1.2 A1_1.1 A1_1.2 A2.1 A2.2 B1.1 B1.2 B1.3 B1.4 B1.5 B1.6 C1.1 C1.2 C4.1 C4.2 C5.1 C5.2 C22.1 C22.2 C41.1 C41.2 C101.1 C101.2 C121.1 C121.2 C172.1 C172.2 C182.1 C182.2 C191.1 C191.2 C192.1 C192.2 C201.1 C201.2 C202.1 C202.2 C203.1 C203.2 C211.1 C211.2 C212.1 C212.2 C214.1 C214.2 C221.1 C221.2 C221_1.1 C221_1.2 C222.1 C222.2 C231.1 C231.2 C231_1.1 C231_1.2 C231_2.1 C231_2.2 C232.1 C232.2 C232_1.1 C232_1.2 C233.1 C233.2 C233_1.1 C233_1.2 C234.1 C234.2 C234_1.1 C234_1.2 C235.1 C235.2 C236.1 C236.2 C241.1 C241.2 C241_1.1 C241_1.2 C241_2.1 C241_2.2 C242.1 C242.2 C251.1 C251.2 C252.1 C252.2 C261.1 C261.2 C262.1 C262.2 C271.1 C271.2 C272.1 C272.2 C291.1 C291.2 C292.1 C292.2 C301.1 C301.2 C302.1 C302.2 C311.1 C311.2 C391.1 C391.2 C401.1 C401.2 FM2.1 FM2_1.1 FM3.1 J1.1 J1.2 J1.3 J1.4 J1.5 J1.6 J1.7 J1.8 J1.9 J1.MH1 J1.MH2 L1.1 L1.2 L231.1 L231.2 L231_1.1 L231_1.2 L232.1 L232.2 L232_1.1 L232_1.2 L233.1 L233.2 L234.1 L234.2 L235.1 L235.2 L236.1 L236.2 L241.1 L241.2 L241_1.1 L241_1.2 L242.1 L242.2 L301.1 L301.2 P1.1 P1.2 P2.1 P2.2 P2.3 P2.4 P2.5 P2.6 P2.7 P2.8 P2.9 P2.10 P3.1 P3.2 P3.3 P3.4 P3.5 P3.6 P3.7 P3.8 P3.9 P3.10 P4.1 P4.2 P4.3 P4.4 P4.5 P4.6 P4.7 P4.8 P4.9 P4.10 R1.1 R1.2 R2.1 R2.2 R2.3 R4.1 R4.2 R9.1 R9.2 R91.1 R91.2 R201.1 R201.2 R271.1 R271.2 R271_1.1 R271_1.2 R301.1 R301.2 S1.1 S1.2 TP3.1 U1.1 U1.2 U1.3 U1.4 U1.5 U1.6 U1.7 U1.8 U1.9 U1.10 U1.11 U1.12 U1.13 U1.14 U1.15 U1.16 U1.17 U1.18 U1.19 U1.20 U1.21 U1.22 U1.23 U1.24 U1.25 U1.26 U1.27 U1.28 U1.29 U1.30 U1.31 U1.32 U1.33 U1.34 U1.35 U1.36 U1.37 U1.38 U1.39 U1.40 U1.41 U1.42 U1.43 U1.44 U1.45 U1.46 U1.47 U1.48 U1.49 U1.50 U1.51 U1.52 U1.53 U1.54 U1.55 U1.56 U1.57 U1.58 U1.59 U1.60 U1.61 U1_1.1 U1_1.2 U1_1.3 U1_1.4 U1_1.5 U1_1.6 U1_1.7 U1_1.8 U1_1.9 U1_1.10 U1_1.11 U1_1.12 U1_1.13 U1_1.14 U1_1.15 U1_1.16 U1_1.17 U1_1.18 U1_1.19 U1_1.20 U1_1.21 U1_1.22 U1_1.23 U1_1.24 U1_1.25 U1_1.26 U1_1.27 U1_1.28 U1_1.29 U1_1.30 U1_1.31 U1_1.32 U1_1.33 U1_1.34 U1_1.35 U1_1.36 U1_1.37 U1_1.38 U1_1.39 U1_1.40 U1_1.41 U1_1.42 U1_1.43 U1_1.44 U1_1.45 U1_1.46 U1_1.47 U1_1.48 U1_1.49 U1_1.50 U1_1.51 U1_1.52 U1_1.53 U1_1.54 U1_1.55 U1_1.56 U1_1.57 U1_1.58 U1_1.59 U1_1.60 U1_1.61 U1_1.62 U1_1.63 U1_1.64 U1_1.65 U1_1.66 U1_2.1 U1_2.2 U1_2.3 U1_2.4 U1_2.5 U1_2.6 U1_2.7 U1_2.8 U1_2.9 U1_2.10 U1_2.11 U1_2.12 U1_2.13 U1_2.14 U1_2.15 U1_2.16 U1_2.17 U2.1 U2.2 U2.3 U2.4 U2.5 U2.6 U2.7 U2.8 U2.9 U2.10 U2.11 U2.12 U2.13 U2.14 U2.15 U2.16 U2.17 U2.18 U2.19 U2.20 U2.21 U2.22 U2.23 U2.24 U2.25 U2.26 U2.27 U2.28 U2.29 U2.30 U2.31 U2.32 U2.33 U2.34 U2.35 U2.36 U2.37 U2.38 U2.39 U2.40 U2.41 U2.42 U2.43 U2.44 U2.45 U2.46 U2.47 U2.48 U2.49 U2.50 U2.51 U2.52 U2.53 U2.54 U2.55 U2.56 U2.57 U2.58 U2.59 U2.60 U2.61 U2_1.1 U2_1.2 U2_1.3 U2_1.4 U2_1.5 U2_1.6 X1.1 X1.2 X1.3 X1.4 X1_1.1 X1_1.2 X1_1.3 X1_1.4 X2.1 X2.2 X2.3 X2.4 X2_1.1 X2_1.2 X2_1.3 X2_1.4 Z1.1 Z1.2
copper on no net: | length 26876.9
  Top Layer w8: 2156.03,1810.04 2196,1810.04 2196,1809.65 ; 2156.03,1895.04 2176.04,1895.04 2181,1900 2181,1907 2183,1909 v1(2200,1909) ; v1(2235,1849) 2266.82,1849 2278.46,1860.64 2306,1860.64 2306,1837 2327.64,1815.36 2335.54,1815.36 ; 2278.46,1815.36 2278.46,1788.54 2285,1782 2355,1782 ; 2310.3,2581.66 2311.3,2581.66 ; 2310.3,2624.97 2311.3,2624.97 2311.3,2665.66 ; v1(2311.3,2553.32) 2311.3,2581.66 ; 2311.3,2708.97 2311.3,2748.97 ; 2311.3,2749.66 2311.3,2748.97 ; v1(2311.3,2821.32) 2311.3,2792.97 v1@2338.3,2792.97 ; 2314,1425 2349,1425 ; 2335.54,1860.64 2359.36,1860.64 2370,1850 2370,1818 2386,1802 2398,1802 ; v1(2337.3,2581.32) 2331.3,2581.32 2331.3,2581.66 2311.3,2581.66 ; 2341,1751 2355,1765 2355,1782 ; 2342.3,2621.66 2342.3,2620.32 2372.3,2620.32 ; 2342.3,2664.97 2342.3,2705.66 2343.3,2705.66 ; 2343.3,2748.97 2311.3,2748.97 ; 2343.37,1568.89 2370.89,1568.89 2396.16,1594.16 2413.65,1593.96 ; 2343.37,1639.76 2371.24,1639.76 2397.16,1613.84 2413.65,1613.65 ; v1(2345.3,2542.32) 2345.3,2542.66 2372.3,2542.66 ; 2364,1681 2364,1674 2404.67,1633.33 2413.65,1633.33 ; 2372.3,2585.97 2372.3,2620.32 ; v1(2373.3,2512.32) 2372.3,2513.32 2372.3,2542.66 ; 2378.65,2620.32 2372.3,2620.32 ; 2385,1534.91 2383,1534.91 2383,1552 2383,1553 2404.28,1574.28 2405.28,1574.28 2413.65,1574.28 ; 2389,1425 2406,1425 2411,1430 2411,1491 2413.65,1493.65 2413.65,1515.22 ; 2391,1843 2391,1819 2398,1812 2398,1802 ; v1(2398.3,2542.32) 2393.3,2542.32 2392.95,2542.66 2372.3,2542.66 ; v1(2409.3,2725.32) 2437.65,2725.32 ; 2413.65,1653.02 2408.79,1653.21 2404.79,1653.21 2384,1674 2384,1776 2378,1782 2355,1782 ; 2413.65,1672.7 2412.1,1672.9 2405.1,1672.9 2398,1680 2398,1802 ; 2421.95,2620.32 2427.65,2620.32 ; 2427.65,2589.32 2427.65,2620.32 ; 2427.65,2653.32 2427.65,2620.32 ; v1(2437.3,2699.32) 2437.3,2703.32 2437.65,2703.66 2437.65,2725.32 ; v1(2437.3,2751.32) 2437.3,2747.32 2437.65,2747.32 2437.65,2725.32 ; v1(2448,1764) 2448,1753 2453.35,1747.65 2453.42,1732.15 ; 2458.24,2799.88 2493.81,2764.32 2620.95,2764.32 2625.3,2768.66 2626.3,2767.66 2626.3,2698.32 2649.93,2674.69 2663.8,2674.69 ; 2470.95,2589.32 2491.65,2589.32 2505.3,2602.97 2505.3,2602.66 2534.3,2602.66 2534.3,2608.32 2569.65,2608.32 ; 2470.95,2653.32 2498.65,2653.32 2505.3,2646.66 2505.3,2645.97 2534.3,2645.97 2534.3,2641.32 2569.65,2641.32 ; 2473,1731 2473,1743 2522,1792 2585,1792 2593,1784 v1(2612,1784) ; 2473.03,1730.97 2473.1,1732.15 ; v1(2479.3,2554.32) 2505.3,2554.32 ; 2480.95,2725.32 2480.95,2714.32 2505.3,2689.97 ; v1(2483,1854) 2483,1864 ; v1(2505.3,2531.32) 2505.3,2554.32 ; v1(2512,1753) 2512.47,1753 2512.47,1732.15 ; 2512.47,1475.46 2512.47,1453.53 2540,1426 2552,1426 v1(2561,1435) ; v1(2531.3,2559.32) 2528.3,2559.32 2528.3,2559.66 2505.3,2559.66 2505.3,2554.32 ; v1(2532,1771) 2532.16,1771 2532.16,1732.15 ; 2532.16,1475.46 2532.16,1463.84 v1(2542,1454) ; 2551.84,1732.15 2551.84,1753 v1(2553,1753) ; 2571.53,1475.46 2571.49,1465.51 2581,1456 2581,1429 2608,1402 2646,1402 2681,1367 ; 2571.53,1732.15 2571.53,1741.53 2575,1745 2575,1768 v1(2572,1771) ; v1(2576.3,2723.32) 2581.3,2723.32 2585.05,2727.07 2606.3,2727.07 ; 2576.35,2870.75 2585.57,2879.97 2661.3,2879.97 2681.3,2859.97 2681.3,2810.32 2646.3,2775.32 2646.3,2703.32 2655.24,2694.37 2663.8,2694.37 ; v1(2578.3,2488.32) 2578.3,2516.66 ; 2591.21,1475.46 2591.18,1465.82 2595,1462 2595,1439 2618,1416 2667,1416 2681,1402 2696,1402 2731,1367 ; 2612.95,2608.32 2637.3,2608.32 2644.61,2615.63 2663.8,2615.63 ; 2612.95,2641.32 2638.3,2641.32 2644.3,2635.32 2663.8,2635.32 ; 2625.3,2811.97 v1(2625.3,2843.32) 2631.95,2836.66 2661.3,2836.66 ; 2625.52,1864 2625.52,1810.48 v1(2635,1801) ; 2630.51,1491 2630.58,1475.46 ; 2630.58,1732.15 2630.51,1723 2658,1723 2677,1742 2677,1767.57 2676.83,1767.57 ; 2631.3,2501.66 2632.3,2501.66 v1(2632.3,2473.32) ; 2663.8,2556.57 2663.8,2479.97 2666.3,2479.97 ; 2666.3,2436.66 2690.95,2436.66 2691.3,2436.32 v1(2692.3,2436.32) ; 2670.35,1534.91 2684.09,1534.91 2687,1532 v1(2701,1532) ; 2670.35,1554.59 2684.59,1554.59 2688,1558 v1(2701,1558) ; 2670.35,1593.96 2683.96,1593.96 2685,1595 2757,1595 2776,1576 2776,1397 2781,1392 2781,1367 ; 2670.35,1613.65 2669.84,1613.84 2758.16,1613.84 ; 2670.35,1633.33 2760.67,1633.33 ; 2670.35,1653.02 2687.48,1653.21 v1(2689.83,1655.57) ; 2670.35,1672.7 2677.16,1672.9 2682,1677.74 2716.26,1677.74 2744,1650 2767,1650 ; 2670.35,1692.39 2693.58,1692.58 2699,1698 2699,1714 ; 2676,1863 v1(2676,1890) 2676,1902 2688,1914 2704,1914 ; 2701.3,2834.97 2712.95,2834.97 2726.3,2848.32 v1(2731.3,2848.32) ; 2716.83,1767.57 2740.57,1767.57 v1(2768,1795) ; 2720.3,2433.76 2720.3,2433.32 2722.3,2433.32 v1(2722.3,2405.32) ; 2744,1914 v1(2776,1914) ; 2744.5,2516.81 2744.5,2487.86 2755.3,2477.07 ; 2744.5,2753.82 2744.5,2765.11 2731.3,2778.32 v1(2731.3,2798.32) 2731.3,2803.32 2741.3,2813.32 2756.3,2813.32 2761.3,2818.32 2761.3,2826.66 ; v1(2755.3,2405.32) 2755.3,2433.76 ; v1(2761.3,2793.32) 2764.19,2793.32 2764.19,2753.82 ; 2761.3,2869.97 v1(2761.3,2898.32) ; v1(2764,1676) 2764,1755 ; 2764.19,2516.81 2764.19,2505.43 2776.3,2493.32 2776.3,2423.32 2786.3,2413.32 v1(2786.3,2408.32) 2786.3,2348.32 ; 2783.87,2516.81 2783.87,2505.74 2791.3,2498.32 2791.3,2448.32 v1(2796.3,2443.32) 2806.3,2433.32 ; 2783.87,2753.82 2783.87,2840.74 2781.3,2843.32 2781.3,2868.32 v1(2801.3,2888.32) ; v1(2801.3,2858.32) 2803.56,2856.06 2803.56,2753.82 ; 2803.56,2516.81 2803.56,2506.06 2806.3,2503.32 2806.3,2463.32 v1(2826.3,2443.32) ; 2823.24,2516.81 2823.24,2481.37 v1(2831.3,2473.32) 2846.3,2458.32 ; 2831.3,2874.97 2831.3,2889.97 2844.65,2903.32 v1(2856.3,2903.32) ; 2842.93,2516.81 2842.93,2496.69 2861.3,2478.32 v1(2866.3,2478.32) ; 2842.93,2753.82 2842.93,2769.94 2851.3,2778.32 ; 2862.61,2516.81 2862.61,2512 2886.3,2488.32 ; 2862.61,2753.82 2862.61,2763.32 ; 2886.3,2853.32 v1(2886.3,2903.32) 2891.3,2908.32 2939.65,2908.32 ; 2900.8,2556.57 2900.8,2493.81 2910.3,2484.32 2942.75,2484.32 2942.75,2468.32 ; 2900.8,2595.94 2941.3,2595.94 v1(2941.3,2593.32) ; 2900.8,2615.63 2933.61,2615.63 v1(2941.3,2623.32) ; 2900.8,2635.32 2923.3,2635.32 2931.3,2643.32 2951.3,2643.32 2971.3,2623.32 ; 2900.8,2655 2922.98,2655 2926.3,2658.32 2956.3,2658.32 2986.3,2628.32 ; 2900.8,2674.69 2959.93,2674.69 ; 2900.8,2694.37 2960.24,2694.37 ; 2900.8,2714.06 2960.56,2714.06 ; v1(2916.3,2738.32) 2939.65,2738.32 ; 2982.95,2738.32 2991.3,2729.97 2991.3,2713.32 ; 3273,2062.5 3456,2062.5 3467,2073.5 3486.5,2073.5 3486.5,2074.37 ; 3278.8,2076.5 3450.2,2076.5 3463.7,2090 3486.5,2090 3486.5,2094.06 ; 3280,1960 3362,1878 3605.5,1878 3605.5,1900.5 v2(3636,1931) 3636,1945 3644,1953 3644,2007 3644.37,2007.37 3644.37,2016.5 ; 3284.6,2090.5 3442.5,2090.5 3465.74,2113.74 3486.5,2113.74 ; 3290.4,2104.5 3428.5,2104.5 3457.43,2133.43 3486.5,2133.43 ; v2(3296,2201) 3296,2200.65 3323,2173.65 ; 3323,2130.35 3315.65,2123 3399.65,2123 3419.65,2143 3447,2143 3457.11,2153.11 3486.5,2153.11 ; v2(3337,2009) 3337,2011 3374.5,2048.5 3486.5,2048.5 3486.5,2054.68 ; v2(3350,2254) 3341,2254 3352,2243 3419.5,2243 3443,2219.5 3443,2212.17 3486.5,2212.17 3486.5,2211 ; v2(3359,2211) 3400.35,2211 ; v2(3371,2007) 3371,2019.5 3382.5,2031 3526.26,2031 3526.26,2016.5 ; v2(3376,2296) 3376,2265.5 3403.35,2265.5 3403.35,2265 ; 3376.35,2143 3360,2143 v2(3360,2172) 3394.35,2172 3396.35,2174 ; 3384.5,1892 3591.5,1892 3591.5,1909 3603.5,1921 3603.5,1932.3 3624.68,1953.48 3624.68,2016.5 ; v2(3394,2362) 3409,2347 3439,2347 3452.5,2333.5 3468,2333.5 3468,2323.65 3476.65,2315 3516.5,2305 3545.94,2275.56 3545.94,2253.5 ; v2(3396,2325) 3433.35,2325 3433.35,2315 ; 3406,1907 3577.5,1907 3577.5,1926.5 3595,1944 3595,1956 3605,1966 3605,2016.5 ; v2(3416,2402) 3461.5,2402 3482.5,2381 3518,2381 3516.65,2379.65 3516.65,2355 3517.5,2355 3517.5,2345 3516.65,2345 3516.65,2329.35 3565.63,2280.37 3565.63,2253.5 ; 3432.35,1978 3435,1978 v2(3435,2008) ; v2(3436,2370) 3473.35,2370 3473.35,2355 ; 3439.65,2174 3486.5,2174 3486.5,2172.8 ; v2(3441,2618) 3441,2534 v2(3452,2523) ; 3443.65,2211 3486.5,2211 ; 3446.65,2265 3460.15,2278.5 3516.5,2278.5 3526.26,2268.74 3526.26,2253.5 ; 3475.65,1978 v2(3520,1978) 3530,1978 3530,1977 3545.5,1992.5 3545.94,1992.06 3545.94,2016.5 ; 3486.5,2192.48 3486.5,2211 ; v2(3512,1932) 3511.5,1932 3565.63,1986.13 3565.63,2016.5 ; v2(3521,2440) 3523.35,2440 3523.35,2409 ; v2(3553,2580) 3553.35,2580 3553.35,2545 ; v2(3554,1935) 3554.5,1935 3583.5,1964 3583.5,2016.5 3585.32,2016.5 ; 3575,2297.5 3585.16,2287.34 3585.16,2242.04 3585.32,2242.19 3585.32,2253.5 ; 3595,2545.65 3595,2584.35 ; 3596.65,2515 3596.65,2545 ; 3605,2253.5 3605,2287.5 3615,2297.5 ; 3624.68,2253.5 3624.68,2277.68 3653.35,2306.35 3659.35,2335 3692.35,2368 v2(3738,2368) ; 3638.65,2666 v2(3676,2666) ; v2@3639.65,2546.73 v2(3639.96,2547.04) ; 3644.37,2253.5 3644.37,2265.37 3689,2310 3744.36,2310 3917.36,2483 3917.36,2482 4085.35,2482 4085.56,2482 4085.56,2424.43 ; v2(3662,1911) 3662,1910 3664.06,1910 3664.06,2016.5 ; 3664.06,2253.5 3664.06,2261.79 3696.27,2294 3750.98,2294 3800.98,2344 3929.35,2344 4026,2247.35 4026,2203 4180.05,2203 4180.05,2259.08 ; 3666.65,2409 v2(3704,2405) ; 3676,2573 3738.5,2510.5 v2(3738,2510) ; 3683.74,2016.5 3683.74,1951.26 3689,1946 v2(3689,1937) 3705.5,1920.5 ; 3683.74,2253.5 3757.35,2253.5 3763.35,2259.5 ; v2(3719,1982) 3719,2054.68 3723.5,2054.68 ; 3723.5,2074.37 3744,2074.37 3744,1948 3739.38,1948 3739.38,1926 v2(3745,1926) ; 3723.5,2094.06 3806.44,2094.06 3821,2079.5 3821,1940.5 ; 3723.5,2113.74 3822.76,2113.74 3845,2091.5 3845,1937.5 ; 3723.5,2133.43 3723.5,2133.5 3838.5,2133.5 3869.5,2102.5 3869.5,1899 ; 3723.5,2153.11 3840.39,2153.11 3883.5,2110 ; 3723.5,2172.8 3723.5,2172.5 3847.5,2172.5 3897.5,2122.5 3897.5,1916 3941.5,1872 4116.3,1872 ; 3723.5,2192.5 3852.5,2192.5 3914.5,2130.5 3914.5,1980 3970,1980 3970,1896 3969.35,1896 ; 3723.5,2212.17 3723.5,2212 3855.63,2212 3874.28,2193.35 3905,2193.35 3928.5,2193.35 3928.5,2193.5 3970,2193.5 3970,2105 ; v2(3741,2659) v2(3803,2721) ; v2(3759,2756) 3759.5,2756 3759.5,2682 v2(3939,2682) ; 3773.32,2580.68 3859,2666.36 v2(3859,2666) ; 3780.35,2282 3763.35,2265 3763.35,2259.5 ; v2(3790,2236) 3766.5,2259.5 3763.35,2259.5 ; 3823.65,2282 3840.65,2265 v2(3849,2265) ; v2(3850,2495) v2(3923,2568) ; v2(3859,2743) v2(3939,2743) ; v2(3905,2280.5) 3905,2236.65 3973,2236.65 v2(3973,2237) ; 4012.65,1896 v2(4053,1896) ; v2(4017,2506) 4118,2506 v2(4118,2509) ; 4026,2290.65 4043,2290.65 v2(4043,2339) ; v2(4068,2093) 4083.5,2093 4178,2187.5 4178,2168 v2(4180,2168) ; v2(4106,2050) 4106,1933 4144,1933 4191.5,1885.5 ; 4128.65,2482 4128.65,2509 v2(4118,2509) ; v2(4133,2339) v2(4169,2339) ; 4221.65,2483 4221.65,2509 v2(4118,2509) ; 2483,1864 2440.48,1864 2483,1864
  Top Layer w10: 2385,1534.91 2386,1534.91 2413.65,1534.91 ; 2386,1542 2386,1543 2397.59,1554.59 2413.65,1554.59 ; 2413.65,1692.39 2425,1692.39 ; 2443,1482 2453.42,1482 2453.42,1475.46 ; v1(2546.3,2528.32) 2546.47,2528.14 2578.3,2559.97 2578.3,2578.32 2631.3,2578.32 2648.93,2595.94 2663.8,2595.94 ; v1(2580.3,2683.32) 2580.3,2683.76 2606.3,2683.76 2616.85,2683.76 2645.61,2655 2663.8,2655 ; v1(2605.3,2545.32) 2606.3,2545.32 2606.3,2544.97 2631.3,2544.97 2631.3,2558.32 2649.24,2576.26 2663.8,2576.26 ; 2610.9,1475.46 2610.9,1454.1 v1(2615,1450) ; v1(2640.3,2436.32) 2639.95,2436.66 2666.3,2436.66 v1(2666.3,2408.32) ; 2663.8,2714.06 2663.8,2740.81 v1(2681.3,2758.32) 2681.3,2783.32 2689.65,2791.66 2701.3,2791.66 ; 2670.35,1515.22 2683.78,1515.22 2699,1500 v1(2714,1500) ; 2670.35,1574.28 2686.28,1574.28 2691,1579 2710,1579 2721,1568 2723,1568 ; v1(2694.3,2477.32) 2696.3,2477.32 2696.3,2477.07 2720.3,2477.07 ; 2705.13,2516.81 2705.13,2492.23 2720.3,2477.07 ; 2724.82,2516.81 2724.82,2477.07 2720.3,2477.07 ; 2823.24,2753.82 v1@2823.24,2797.17 ; v1(2824.3,2798.32) 2823.3,2798.32 v1@2823.3,2797.11 ; 2831.3,2831.66 2823.24,2823.61 v1@2823.24,2797.17 ; 2865.28,2796.11 2824.3,2796.11 v1@2823.3,2797.11 ; 2871.57,2796.11 2911.3,2796.11 v1(2911.3,2798.32) ; 2900.8,2576.26 2909.35,2576.26 v1(2937.3,2548.32) ; v1@2823.24,2797.17 v1@2823.3,2797.11
  Top Layer w12: 2196,1719 2196,1747 ; 2196,1766.35 2196,1747 ; 2292.19,1568.89 2268.11,1568.89 2238,1599 2238,1718 2210,1746 2196,1746 2196,1747 ; 2337,1705 v1(2364,1705) 2364,1681 ; v1(2385,1453) 2385,1481 2385,1515 2385,1534.91 ; 2386,1534.91 2386,1542 ; 2425,1692.39 v1(2425,1795) 2447,1795 ; 2433,1412 v1(2460,1412) ; 2443,1482 2433,1482 2433,1452 ; v1(2460,1452) 2438,1452 ; v1(2602,1758) 2625,1758 2663,1796 ; v1(2615,1450) 2627,1438 2653,1438 ; 2630.51,1491 2651,1491 2670,1472 2693,1472 ; 2649,1782 2663,1796 ; 2676,1823 v1(2676,1796) ; 2699,1714 v1(2699,1740) ; 2710,1823 v1(2710,1796) v1(2676,1796) ; 2710,1863 v1(2710,1886) v1(2744,1886) 2744,1863 ; 2723,1568 2729,1568 v1(2755,1568) ; 2729,1507 2729,1528 v1(2756,1528) ; v1(2739,1687) 2739,1714 v1(2739,1741) ; 2744,1823 2769,1823 v1(2777,1831) v1(2777,1868) v1@2777,1868.3 ; v1(2911.3,2798.32) 2939.65,2798.32 2939.65,2853.32 2966.3,2853.32 ; 3463.4,2692.9 3463.4,2703.85 3553.4,2703.85 ; v2(3466,2747) 3518,2747 v2(3518,2740) v2@3518,2745 ; 3516.58,2785.15 3516.58,2745 v2@3518,2745 ; v2(3521,2440) v2(3521,2495) ; v2(3556,2745) v2@3518,2745 ; 3565,2453.35 3566.65,2453.35 3566.65,2409 3575,2409 3575,2366.65 ; 3565,2496.65 3596.65,2518.31 3596.65,2544 ; 3575,2297.5 3575,2323.35 ; 3595,2545.65 3596.65,2544 ; 3595,2627.65 3595,2666 ; 3595,2703.35 3595,2666 ; 3595,2746.65 3596.11,2746.65 3596.11,2785.15 ; 3595.35,2666 3595,2666 ; 3596.65,2515 3625,2496.65 ; 3596.65,2545 3596.65,2544 ; 3615,2297.5 3615,2323.35 ; 3615,2366.65 3615,2409 3623.35,2409 3623.35,2453.35 3625,2453.35 ; 2433,1452 2438,1452 ; 2433,1452 2438,1452 ; 2663,1796 v1(2676,1796)
  Top Layer w31: 2235.75,2625 2270.35,2625 ; 2270.32,2624.97 2310.3,2624.97
  Mid-Layer 2 w8: v1(2448,1764) 2448,1778 2472,1802 2492,1802 2524,1834 2589,1834 2645,1890 v1(2676,1890) ; 2481,1367 2481,1394 2480,1395 2480,1488 2454,1514 2454,1695 v1(2512,1753) ; 2531,1367 2494,1404 2494,1698 2532,1736 v1(2532,1771) ; v1(2542,1454) 2597,1509 2617,1509 2631,1523 2631,1560 2690,1619 2731,1619 2764,1652 v1(2764,1676) ; v1(2553,1753) 2553,1717 2542,1706 2542,1529 2508,1495 2508,1428 2538,1398 2550,1398 2581,1367 ; v1(2561,1435) 2614,1488 2630,1488 2664,1522 2664,1568 2701,1605 ; v1(2572,1771) 2575,1768 2575,1701 2588,1688 2588,1534 2522,1468 2522,1444 2550,1416 2554,1416 2572,1398 2600,1398 2631,1367 ; v1(2612,1784) 2653,1743 2653,1657 2676,1634 2703,1634 2714,1645 2714,1695 2727,1708 2781,1708 ; v1(2635,1801) 2679,1757 2679,1713 2689.83,1702.17 v1(2689.83,1655.57) ; v1(2701,1532) 2729,1532 2745,1548 ; v1(2701,1558) 2716,1558 2726,1568 2726,1584 2733,1591
  Mid-Layer 2 w12: v1(2364,1705) 2364,1826 2395,1857 2395,1881 ; v1(2385,1453) 2340,1498 2340,1683 2298,1725 2298,1861 2318,1881 2395,1881 ; v1(2425,1795) 2425,1809 2461,1845 2461,1881 ; v1(2460,1452) 2409,1503 2409,1713 2432,1736 2458,1736 2519,1797 2583,1797 2651,1865 2698,1865 2710,1877 v1(2710,1886) 2710,1902 2696,1916 2637,1916 2602,1881 2461,1881 ; v1(2483,1823) v1(2483,1854) v1(2530,1854) v1(2576,1854) ; v1(2615,1450) 2615,1451 2636,1472 2778,1472 ; v1(2699,1740) 2744,1785 ; v1(2744,1886) 2744,1785 ; 2746,1785 2744,1785 ; 2395,1881 2461,1881
  other v1: 2180,1336 2324,1336 2364,1336 2408,1336 2455,1336 2504,1336 2554,1336 2604,1336 2654,1336 2704,1336 2754,1336 2343,1366 2399,1366 2180,1369 2309,1370 2433,1383 2203,1386 2321,1396 2349,1396 2389,1396 2180,1399 2277,1399 2215,1410 2746,1411 2721,1412 2247,1425 2180,1429 2721,1438 2746,1438 2274,1454 2318,1454 2349,1454 2180,1459 2205,1473 2318,1481 2180,1489 2742,1500 2205,1504 2235,1504 2265,1504 2318,1508 2289,1514 2180,1519 2235,1534 2205,1535 2318,1535 2180,1549 2205,1564 2180,1579 2204,1594 2317.46,1604.64 2180,1609 2204,1624 2180,1639 2270,1640.07 2270,1674 2291.87,1674 2317.46,1674 2270,1698 2270,1724 2276,1751 2235,1789 2235,1819 2235,1879 2235,1909 2391,1911 2483,1911 2529,1911 2576,1911 2750.3,2373.32 2688.3,2375.32 2622.3,2376.32 2539.3,2378.32 2396.3,2379.32 2483.3,2381.32 2578.3,2395.32 2319.3,2396.32 2547.3,2445.32 2593.3,2445.32 2373.3,2460.32 2516.3,2473.32 2318.3,2476.32 2486.3,2503.32 2385.3,2662.32 2543.3,2694.32 2383.3,2707.32 2522.3,2730.32 2376.3,2761.32 2338.3,2794.32 2393.3,2797.32 2312.3,2866.32 2711.3,2896.32 2340.3,2898.32 2314.3,2928.32 2553.3,2929.32 2630.3,2929.32 2442.3,2930.32 2498.3,2930.32 2683.3,2930.32 2388.3,2931.32 2749.3,2933.32
  other v2: 4126,1895 3923,2401 3738,2426 3452,2431 4017,2431 3494,2562 3791,2563 3478,2602 3526,2622 3518,2662 3680,2756
  other v3: 2415.32,2165.31 2454.69,2165.32 2435,2185 2415.32,2204.68 2454.69,2204.69

## Polygon pours and split planes (outlines as drawn)
no net on Top Layer "tpl5" (solid, remove dead copper, shelved, pour order 36): 2403,1531 2403,1578 2379,1554 2379,1531
no net on Top Layer "AGND_TOP_C" (solid, remove dead copper, shelved, pour order 32): 2498,1813 2586,1813 2586,1921 2374,1921 2374,1861 2409,1861 2409,1813 2476,1813 2476,1784 2498,1784
no net on Top Layer "tpl0" (solid, remove dead copper, shelved, pour order 30): 2169,1310 2169,1428 2331,1428 2331,1310
no net on Top Layer "rtarea0" (solid, remove dead copper, shelved, pour order 26): 2324,1324 2324,1396 2169,1396 2169,1696 2215,1696 2215,1576 2264,1527 2306,1527 2306,1604 2283.05,1604 2260.05,1627 2260.05,1736 2224,1772 2224,1922 2251,1922 2251,1767 2318,1767 2318,1686 2328,1686 2328,1532 2366,1532 2366,1432 2450,1433 2450,1470 2621,1470 2621,1394 2455,1394 2455,1324
no net on Top Layer "TEMPLATE1" (solid, remove dead copper, shelved, pour order 8): 3407,2318 3596,2318 3596,2781 3407,2781
no net on Top Layer "TEMPLATE0" (solid, remove dead copper, shelved, pour order 6): 3599.46,2321 3810.11,2325 4023,2325 4023,2782 3595,2783
no net on Top Layer "Layer 1 GND" (solid, shelved, pour order 4): 2296.3,2360.32 2296.3,2945.32 2775.3,2945.32 2775.3,2360.32
no net on Mid-Layer 2 "VDD_T1" (solid, shelved, pour order 2): 2169,1310 2169,1940 2781,1940 2781,1411 2377.45,1411 2350,1385.83 2350,1310

## Keep-outs
Keep-Out Layer:
  lines w1: 1929,1310 1929,1940

## Silkscreen, mask and mechanical layers (free items; w line width, h text height)
Top Overlay:
  text "1" at 2489.09,1332.38 h14 r90
Mechanical 1:
  lines w10: 1880,1250 4285,1250 ; 1890,1250 1890,2995 4295,2995 4295,1260

## Text inside footprints (layer, text, board x,y; h text height)
J1: Mechanical 1 "PCB Edge" at 1912.98,2333.91 h9.84 r270
P2: Top Overlay "10" at 3755,1350 h50 r180; Top Overlay "9" at 3755,1450 h50 r180; Top Overlay "1" at 4295,1450 h50 r180; Top Overlay "2" at 4315,1350 h50 r180
P3: Top Overlay "10" at 3180,1355 h50 r180; Top Overlay "9" at 3180,1455 h50 r180; Top Overlay "1" at 3720,1455 h50 r180; Top Overlay "2" at 3740,1355 h50 r180
P4: Top Overlay "10" at 3755,1595 h50 r180; Top Overlay "9" at 3755,1695 h50 r180; Top Overlay "1" at 4295,1695 h50 r180; Top Overlay "2" at 4315,1595 h50 r180